# EAGLE board CT_schematic (EAGLE 7.6.0)

Size 100 x 80 mm. Coordinates in mm from the lower left corner, seen from the top.
Outline: 0,0 100,0 100,80 0,80 0,0
Copper layers (1*16): Top 0.035mm / dielectric 1.5mm / Bottom 0.035mm
Design rules "default": minimum track width 10mil, minimum drill 24mil, track to track 8mil, track to pad 8mil, pad to pad 8mil, via to via 8mil, smd to smd 8mil, copper to edge 40mil, drill to drill 8mil, minimum pad ring 10mil, minimum via ring 8mil, stop-mask expansion 4mil, vias tented up to drill 0mil, thermal gap 10mil

## Footprints (pad centres in the part's own frame; a part is rotated, then mirrored left to right if it is on the bottom)
C0603 = smd 0.8 x 0.8: 1 -0.762,0; 2 0.762,0
C0402 = smd 0.5 x 0.5: 1 -0.508,0; 2 0.508,0
EXV-9B = smd 2.718 x 1.778: 1 -2.108,0; 2 2.108,0
EXV-9H = smd 3.505 x 1.676: 1 -2.857,0; 2 2.857,0
L0603 = smd 0.8 x 0.8: 1 -0.762,0; 2 0.762,0
PJ-037B_PACKAGE = drill 3.7 square: 1 12,0 | drill 3.2 square: 2 6,0
R0603 = smd 0.8 x 0.8: 1 -0.762,0; 2 0.762,0
LQFP100 = smd 0.3 x 1.2: 1 -6,-7.75; 2 -5.5,-7.75; 3 -5,-7.75; 4 -4.5,-7.75; 5 -4,-7.75; 6 -3.5,-7.75; 7 -3,-7.75; 8 -2.5,-7.75; 9 -2,-7.75; 10 -1.5,-7.75; 11 -1,-7.75; 12 -0.5,-7.75; 13 0,-7.75; 14 0.5,-7.75; 15 1,-7.75; 16 1.5,-7.75; 17 2,-7.75; 18 2.5,-7.75; 19 3,-7.75; 20 3.5,-7.75; 21 4,-7.75; 22 4.5,-7.75; 23 5,-7.75; 24 5.5,-7.75; 25 6,-7.75; 51 6,7.75; 52 5.5,7.75; 53 5,7.75; 54 4.5,7.75; 55 4,7.75; 56 3.5,7.75; 57 3,7.75; 58 2.5,7.75; 59 2,7.75; 60 1.5,7.75; 61 1,7.75; 62 0.5,7.75; 63 0,7.75; 64 -0.5,7.75; 65 -1,7.75; 66 -1.5,7.75; 67 -2,7.75; 68 -2.5,7.75; 69 -3,7.75; 70 -3.5,7.75; 71 -4,7.75; 72 -4.5,7.75; 73 -5,7.75; 74 -5.5,7.75; 75 -6,7.75 | smd 1.2 x 0.3: 26 7.75,-6; 27 7.75,-5.5; 28 7.75,-5; 29 7.75,-4.5; 30 7.75,-4; 31 7.75,-3.5; 32 7.75,-3; 33 7.75,-2.5; 34 7.75,-2; 35 7.75,-1.5; 36 7.75,-1; 37 7.75,-0.5; 38 7.75,0; 39 7.75,0.5; 40 7.75,1; 41 7.75,1.5; 42 7.75,2; 43 7.75,2.5; 44 7.75,3; 45 7.75,3.5; 46 7.75,4; 47 7.75,4.5; 48 7.75,5; 49 7.75,5.5; 50 7.75,6; 76 -7.75,6; 77 -7.75,5.5; 78 -7.75,5; 79 -7.75,4.5; 80 -7.75,4; 81 -7.75,3.5; 82 -7.75,3; 83 -7.75,2.5; 84 -7.75,2; 85 -7.75,1.5; 86 -7.75,1; 87 -7.75,0.5; 88 -7.75,0; 89 -7.75,-0.5; 90 -7.75,-1; 91 -7.75,-1.5; 92 -7.75,-2; 93 -7.75,-2.5; 94 -7.75,-3; 95 -7.75,-3.5; 96 -7.75,-4; 97 -7.75,-4.5; 98 -7.75,-5; 99 -7.75,-5.5; 100 -7.75,-6
SAMTEC_FTSH-105-01-L-DV-K = smd 0.762 x 2.794: 1 -2.54,-2.032; 2 -2.54,2.032; 3 -1.27,-2.032; 4 -1.27,2.032; 5 0,-2.032; 6 0,2.032; 7 1.27,-2.032; 8 1.27,2.032; 9 2.54,-2.032; 10 2.54,2.032
SOIC-8 = smd 1.6 x 0.6: 1 -2.7,1.905 | smd 1.55 x 0.6: 2 -2.7,0.635; 3 -2.7,-0.635; 4 -2.7,-1.905; 5 2.7,-1.905; 6 2.7,-0.635; 7 2.7,0.635; 8 2.7,1.905
WNG008 = smd 0.45 x 0.55: 1 -1.27,0; 2 0,0; 3 1.27,0; 4 2.54,0; 5 2.54,7.5; 6 1.27,7.5; 7 0,7.5; 8 -1.27,7.53 | smd 4.9 x 4.75: PAD 0.635,3.75
TSSOP20-I = smd 0.4 x 1.35: 1 -2.925,-2.875; 2 -2.275,-2.875; 3 -1.625,-2.875; 4 -0.975,-2.875; 5 -0.325,-2.875; 6 0.325,-2.875; 7 0.975,-2.875; 8 1.625,-2.875; 9 2.275,-2.875; 10 2.925,-2.875; 11 2.925,2.875; 12 2.275,2.875; 13 1.625,2.875; 14 0.975,2.875; 15 0.325,2.875; 16 -0.325,2.875; 17 -0.975,2.875; 18 -1.625,2.875; 19 -2.275,2.875; 20 -2.925,2.875
HTSS-105-01-G-D = drill 1 pad 1.8 square: 1 0,0 | drill 1 pad 1.8: 2 0,2.54; 3 2.54,0; 4 2.54,2.54; 5 5.08,0; 6 5.08,2.54; 7 7.62,0; 8 7.62,2.54; 9 10.16,0; 10 10.16,2.54
FCI_10118193-0001LF = smd 0.4 x 1.35: 1 -1.3,2.675; 2 -0.65,2.675; 3 0,2.675; 4 0.65,2.675; 5 1.3,2.675 | smd 1.6 x 1.4: 6 -3.2,2.45; 7 3.2,2.45 | smd 1.9 x 1.9: 8 -1.2,0; 9 1.2,0 | hole 0.5: -3.3,0; 3.3,0
SOT143B = smd 1 x 0.7: 1 -0.75,-1 | smd 0.6 x 0.7: 2 0.95,-1; 3 0.95,1; 4 -0.95,1
ABS07-32.768KHZ-7-T = smd 1.1 x 2.4: 1 -2.5,0; 2 0,0
ASFL1 = smd 1.7 x 1.5: 1 -1.27,-1.1; 2 1.27,-1.1; 3 1.27,1.1; 4 -1.27,1.1
LP2954 = smd 1.6 x 0.6: 1 -2.475,1.905 | smd 1.55 x 0.6: 2 -2.475,0.635; 3 -2.475,-0.635; 4 -2.475,-1.905; 5 2.475,-1.905; 6 2.475,-0.635; 7 2.475,0.635; 8 2.475,1.905
SON-6 = smd 0.55 x 0.3: 1 -0.355,0.5 | smd 0.52 x 0.3: 2 -0.37,0; 3 -0.37,-0.5; 4 0.37,-0.5; 5 0.37,0; 6 0.37,0.5
SW_4-1437565-2 = smd 1.4 x 2.1: 1 -2.23,4.55; 2 -2.23,-4.55; 3 2.23,4.55; 4 2.23,-4.55
LGM67K-G1J2-24-Z = smd 0.8 x 1.4: A -2,0; C 0,0
NC7SZ125M5X = smd 1.3 x 0.7: 1 -1.3,0.95; 2 -1.3,0; 3 -1.3,-0.95; 4 1.3,-0.95; 5 1.3,0.95

## Placement (x,y rotation side)
C1  1e-06  [C0603]  -60.96,68.58 0 top  (outside the outline)
C2  1e-07  [C0603]  -64.77,68.58 0 top  (outside the outline)
C3  1e-07  [C0603]  -68.58,68.58 0 top  (outside the outline)
C4  1e-07  [C0603]  -72.39,68.58 0 top  (outside the outline)
C5  1e-07  [C0603]  -15.24,73.66 0 top  (outside the outline)
C6  1e-07  [C0603]  -19.05,73.66 0 top  (outside the outline)
C7  1e-07  [C0603]  -22.86,73.66 0 top  (outside the outline)
C8  4.7e-06  [C0603]  -49.53,68.58 0 top  (outside the outline)
C9  2.2e-06  [C0603]  -53.34,68.58 0 top  (outside the outline)
C10  2.2e-06  [C0603]  -57.15,68.58 0 top  (outside the outline)
C11  1e-08  [C0603]  -26.67,73.66 0 top  (outside the outline)
C12  1e-06  [C0603]  -30.48,73.66 0 top  (outside the outline)
C13  1e-11  [C0402]  -64.77,73.66 0 top  (outside the outline)
C14  1e-11  [C0402]  -68.58,73.66 0 top  (outside the outline)
C15  1e-06  [C0603]  -34.29,73.66 0 top  (outside the outline)
C16  1e-07  [C0402]  -72.39,73.66 0 top  (outside the outline)
C17  1e-08  [C0402]  -15.24,78.74 0 top  (outside the outline)
C18  1e-08  [C0402]  -19.05,78.74 0 top  (outside the outline)
C19  1e-07  [C0402]  -22.86,78.74 0 top  (outside the outline)
C20  1e-07  [C0402]  -26.67,78.74 0 top  (outside the outline)
C21  1e-07  [C0402]  -30.48,78.74 0 top  (outside the outline)
C22  1e-07  [C0402]  -34.29,78.74 0 top  (outside the outline)
C23  1e-07  [C0402]  -38.1,78.74 0 top  (outside the outline)
C24  1e-07  [C0402]  -41.91,78.74 0 top  (outside the outline)
C25  1e-08  [C0402]  -45.72,78.74 0 top  (outside the outline)
C26  1e-06  [EXV-9B]  -60.96,54.61 0 top  (outside the outline)
C27  2.2e-06  [EXV-9B]  -69.85,54.61 0 top  (outside the outline)
C28  1e-07  [C0402]  -49.53,78.74 0 top  (outside the outline)
C29  0.0001  [EXV-9H]  -62.23,46.99 0 top  (outside the outline)
C30  0.0001  [EXV-9H]  -17.78,55.88 0 top  (outside the outline)
C31  1e-08  [C0402]  -53.34,78.74 0 top  (outside the outline)
C32  1e-08  [C0402]  -57.15,78.74 0 top  (outside the outline)
F1  240.0  [L0603]  -38.1,73.66 0 top  (outside the outline)
J1  PJ-037B  [PJ-037B_PACKAGE]  -27.94,24.13 0 top  (outside the outline)
R2  1000.0  [R0603]  -41.91,73.66 0 top  (outside the outline)
R4  4700.0  [R0603]  -45.72,73.66 0 top  (outside the outline)
R5  2200.0  [R0603]  -49.53,73.66 0 top  (outside the outline)
R6  2200.0  [R0603]  -53.34,73.66 0 top  (outside the outline)
R7  10000.0  [R0603]  -59.69,62.23 0 top  (outside the outline)
R8  10000.0  [R0603]  -64.77,62.23 0 top  (outside the outline)
R9  10000.0  [R0603]  -69.85,62.23 0 top  (outside the outline)
R10  10000.0  [R0603]  -15.24,68.58 0 top  (outside the outline)
R11  5.0  [R0603]  -57.15,73.66 0 top  (outside the outline)
R12  10000.0  [R0603]  -20.32,68.58 0 top  (outside the outline)
R13  10000.0  [R0603]  -25.4,68.58 0 top  (outside the outline)
R14  10000.0  [R0603]  -30.48,68.58 0 top  (outside the outline)
R15  10000.0  [R0603]  -35.56,68.58 0 top  (outside the outline)
R16  100000.0  [R0603]  -34.29,62.23 0 top  (outside the outline)
R17  100000.0  [R0603]  -39.37,62.23 0 top  (outside the outline)
R18  164658.62  [R0603]  -29.21,62.23 0 top  (outside the outline)
R19  100000.0  [R0603]  -44.45,62.23 0 top  (outside the outline)
R20  10000.0  [R0603]  -40.64,68.58 0 top  (outside the outline)
R21  10000.0  [R0603]  -45.72,68.58 0 top  (outside the outline)
R22  9100.0  [R0603]  -60.96,73.66 0 top  (outside the outline)
R23  680000.0  [R0603]  -49.53,62.23 0 top  (outside the outline)
R24  120000.0  [R0603]  -54.61,62.23 0 top  (outside the outline)
U1  stm32f401VCT6  [LQFP100]  -22.86,8.89 0 top  (outside the outline)
U2  FTSH-105-01-L-DV-K  [SAMTEC_FTSH-105-01-L-DV-K]  -54.61,7.62 0 top  (outside the outline)
U3  M24M02-DRMN6TP  [SOIC-8]  -63.5,35.56 0 top  (outside the outline)
U4  S25FL128SDPNFI001  [WNG008]  -29.21,34.29 0 top  (outside the outline)
U5  SP3203ECY-L/TR  [TSSOP20-I]  -59.69,22.86 0 top  (outside the outline)
U6  HTSS-105-01-G-D  [HTSS-105-01-G-D]  -46.99,35.56 0 top  (outside the outline)
U7  10118193-0001LF  [FCI_10118193-0001LF]  -52.07,45.72 0 top  (outside the outline)
U8  prtr5v0u2ax  [SOT143B]  -69.85,78.74 0 top  (outside the outline)
U9  ABS07-32.768KHZ-7-T  [ABS07-32.768KHZ-7-T]  -39.37,55.88 0 top  (outside the outline)
U10  ASFL1-25MHZ-NCS  [ASFL1]  -43.18,46.99 0 top  (outside the outline)
U11  LP2954AIMX/NOPB  [LP2954]  -25.4,46.99 0 top  (outside the outline)
U12  TPS3895ADRYR  [SON-6]  -13.97,82.55 0 top  (outside the outline)
U13  4-1437565-2  [SW_4-1437565-2]  -44.45,24.13 0 top  (outside the outline)
U14  Q65110A2395  [LGM67K-G1J2-24-Z]  -48.26,54.61 0 top  (outside the outline)
U15  nc7sz125m5x  [NC7SZ125M5X]  -15.24,62.23 0 top  (outside the outline)
U16  nc7sz125m5x  [NC7SZ125M5X]  -21.59,62.23 0 top  (outside the outline)

## Library data of the parts
C1-C32 F1 J1 R2 R4-R24 U1-U16 = circuit_tree

## Nets
CLK_CRYSTAL_U1_8: C13.1 U1.8 U9.1
CLK_CRYSTAL_U1_9: C14.1 U1.9 U9.2
CLK_U1_12: U1.12 U10.3
GND: C1.2 C2.2 C3.2 C4.2 C5.2 C6.2 C7.2 C8.2 C9.2 C10.2 C11.2 C12.2 C13.2 C14.2 C15.2 C16.2 C17.2 C18.2 C19.2 C20.2 C23.2 C24.2 C25.2 C26.2 C27.2 C28.2 C29.2 C30.2 C31.2 C32.2 J1.2 R2.2 R7.2 R11.2 R12.2 R19.2 R22.2 R24.2 U1.10 U1.20 U1.27 U1.49 U1.70 U1.74 U1.99 U2.3 U2.5 U3.4 U4.4 U4.PAD U5.18 U6.9 U7.5 U7.6 U7.7 U7.8 U7.9 U8.1 U10.2 U11.4 U12.2 U14.C U15.2 U15.3 U16.1 U16.3
NET_U1_14: R4.1 U1.14 U16.4
NET_U1_22: C11.1 C12.1 F1.1 U1.21 U1.22
NET_U1_48: C9.1 U1.48
NET_U1_73: C10.1 U1.73
NET_U1_92: R5.1 U1.92 U3.6
NET_U1_93: R6.1 U1.93 U3.5
NET_U1_94: R7.1 U1.94
NET_U1_97: U14.A
NET_U1_98: U13.3 U13.4
NET_U2_9: R11.1 U2.9
NET_U3_3: R12.1 U3.3
NET_U4_3: R13.1 U4.3
NET_U4_7: R15.1 U4.7
NET_U5_1: C21.1 U5.1
NET_U5_2: C23.1 U5.2
NET_U5_3: C21.2 U5.3
NET_U5_4: C22.1 U5.4
NET_U5_5: C22.2 U5.5
NET_U5_6: C24.1 U5.6
NET_U5_20: U5.20
NET_U6_3: U5.14 U6.3
NET_U6_4: U5.13 U6.4
NET_U6_5: U5.17 U6.5
NET_U6_6: U5.16 U6.6
NET_U11_3: R17.1 U11.3
NET_U11_5: R16.1 U11.5
NET_U11_7: R18.2 R19.1 U11.7
NET_U12_1: R21.1 R22.1 U12.1
NET_U12_3: R23.2 R24.1 U12.3
NET_U12_4: R20.1 U12.4 U15.4 U16.2
NET_U13_1: R2.1 U13.1 U13.2
PROC_SPI1_MISO: U1.31 U4.2
PROC_SPI1_MOSI: U1.32 U4.5
PROC_SPI1_NSS: R14.1 U1.29 U4.1
PROC_SPI1_SCK: U1.30 U4.6
PROC_SYS_JTCK_SWCLK: R9.1 U1.76 U2.4
PROC_SYS_JTDO_SWO: U1.89 U2.6
PROC_SYS_JTMS_SWDIO: R10.1 U1.72 U2.2
PROC_USART2_CTS: U1.23 U5.8
PROC_USART2_RTS: U1.24 U5.10
PROC_USART2_RX: U1.26 U5.11
PROC_USART2_TX: U1.25 U5.7
PROC_USB_OTG_FS_DM: U1.70 U7.2 U8.3
PROC_USB_OTG_FS_DP: U1.71 U7.3 U8.2
PROC_USB_OTG_FS_VBUS: C15.1 U1.68 U7.1 U8.4
RST_OUT_U2_JTAG_RST_B: R8.1 U2.10 U15.1
VCC_S1_9V5: C26.1 C29.1 C30.1 J1.1 R17.2 U11.8
VCC_TIER1_3V3: C1.1 C2.1 C3.1 C4.1 C5.1 C6.1 C7.1 C8.1 C16.1 C17.1 C18.1 C19.1 C20.1 C25.1 C27.1 C28.1 C31.1 C32.1 F1.2 R4.2 R5.2 R6.2 R8.2 R9.2 R10.2 R13.2 R14.2 R15.2 R16.2 R18.1 R20.2 R21.2 R23.1 U1.6 U1.11 U1.19 U1.28 U1.50 U1.75 U1.100 U2.1 U3.8 U4.8 U5.12 U5.19 U10.4 U11.1 U12.6 U15.5 U16.5

## Tracks (layer width: path | path; a pad name or v marks a point on that pad's centre or on a via)
CLK_CRYSTAL_U1_8  (2 unrouted)
CLK_CRYSTAL_U1_9  (2 unrouted)
CLK_U1_12  (1 unrouted)
GND  (65 unrouted)
NET_U1_14  (2 unrouted)
NET_U1_22  (4 unrouted)
NET_U1_48  (1 unrouted)
NET_U1_73  (1 unrouted)
NET_U1_92  (2 unrouted)
NET_U1_93  (2 unrouted)
NET_U1_94  (1 unrouted)
NET_U1_98  (1 unrouted)
NET_U2_9  (1 unrouted)
NET_U3_3  (1 unrouted)
NET_U4_3  (1 unrouted)
NET_U4_7  (1 unrouted)
NET_U5_1  (1 unrouted)
NET_U5_2  (1 unrouted)
NET_U5_3  (1 unrouted)
NET_U5_4  (1 unrouted)
NET_U5_5  (1 unrouted)
NET_U5_6  (1 unrouted)
NET_U6_3  (1 unrouted)
NET_U6_4  (1 unrouted)
NET_U6_5  (1 unrouted)
NET_U6_6  (1 unrouted)
NET_U11_3  (1 unrouted)
NET_U11_5  (1 unrouted)
NET_U11_7  (2 unrouted)
NET_U12_1  (2 unrouted)
NET_U12_3  (2 unrouted)
NET_U12_4  (3 unrouted)
NET_U13_1  (2 unrouted)
PROC_SPI1_MISO  (1 unrouted)
PROC_SPI1_MOSI  (1 unrouted)
PROC_SPI1_NSS  (2 unrouted)
PROC_SPI1_SCK  (1 unrouted)
PROC_SYS_JTCK_SWCLK  (2 unrouted)
PROC_SYS_JTDO_SWO  (1 unrouted)
PROC_SYS_JTMS_SWDIO  (2 unrouted)
PROC_USART2_CTS  (1 unrouted)
PROC_USART2_RTS  (1 unrouted)
PROC_USART2_RX  (1 unrouted)
PROC_USART2_TX  (1 unrouted)
PROC_USB_OTG_FS_DM  (2 unrouted)
PROC_USB_OTG_FS_DP  (2 unrouted)
PROC_USB_OTG_FS_VBUS  (3 unrouted)
RST_OUT_U2_JTAG_RST_B  (2 unrouted)
VCC_S1_9V5  (5 unrouted)
VCC_TIER1_3V3  (49 unrouted)